# EAGLE board wifi_4layer (EAGLE 5.11)
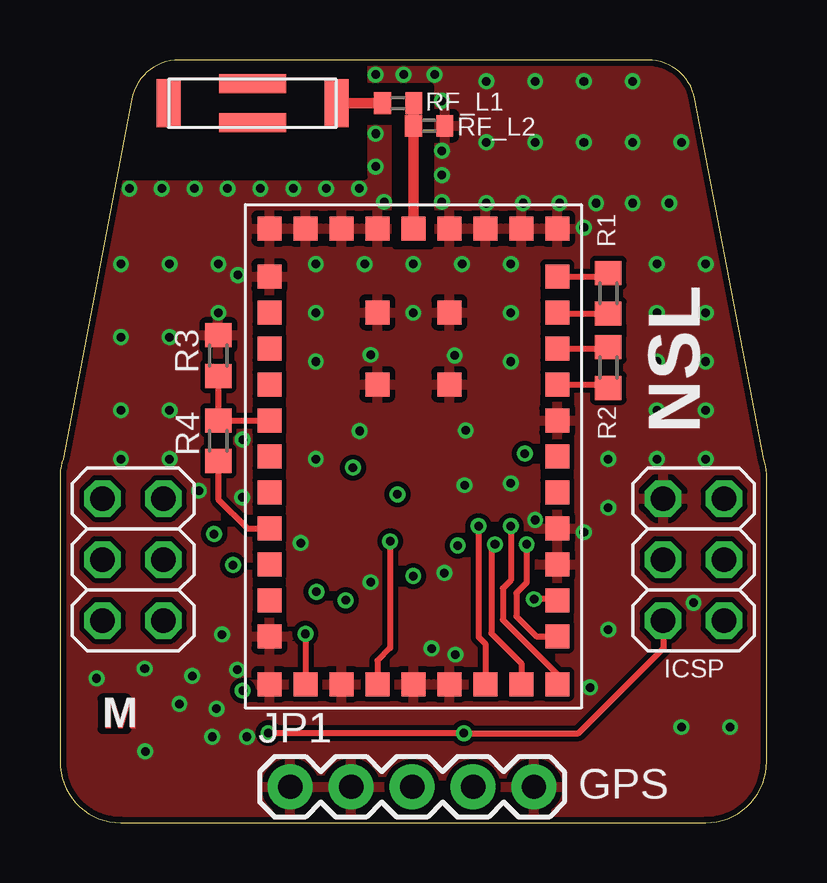
[diagram p0: board, top side]
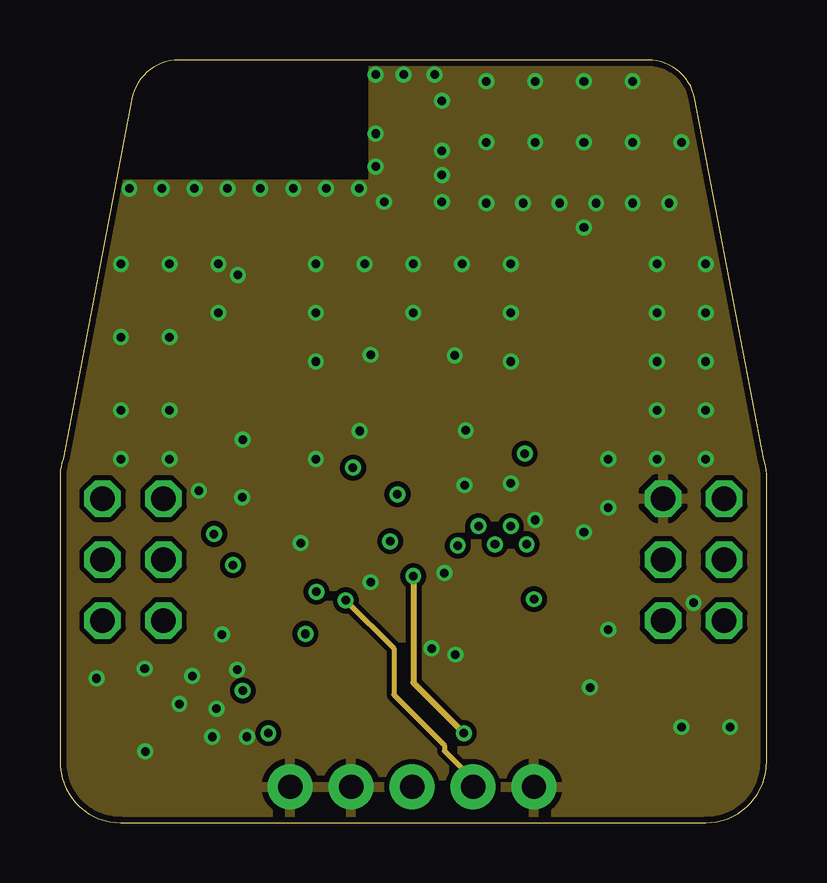
[diagram p1: board, inner layer Route2]
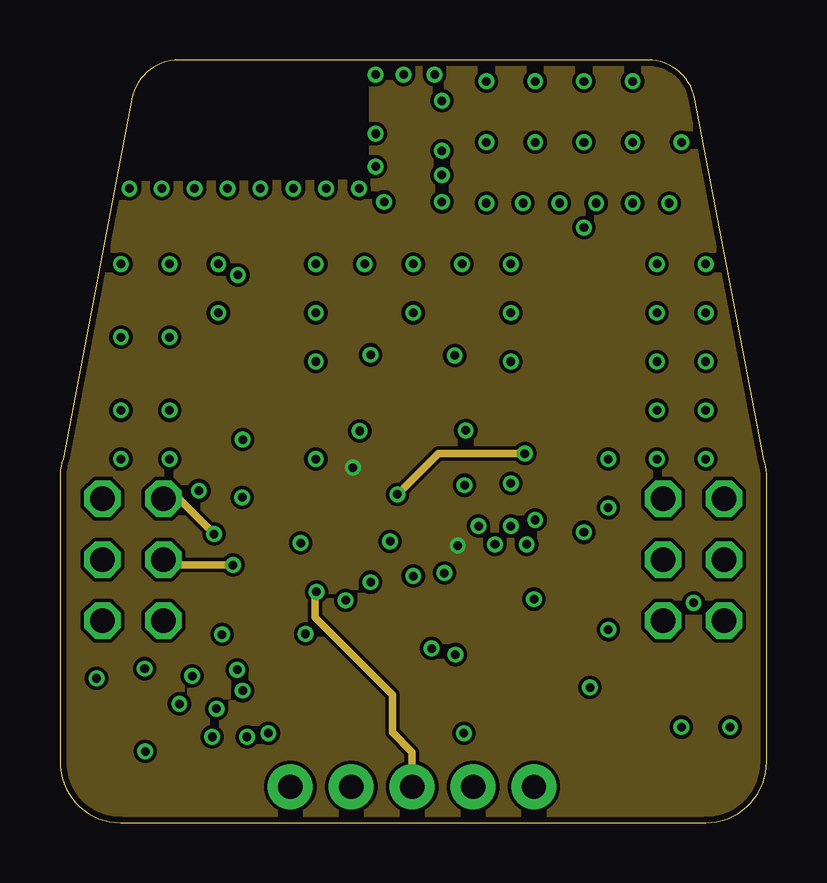
[diagram p2: board, inner layer Route15]
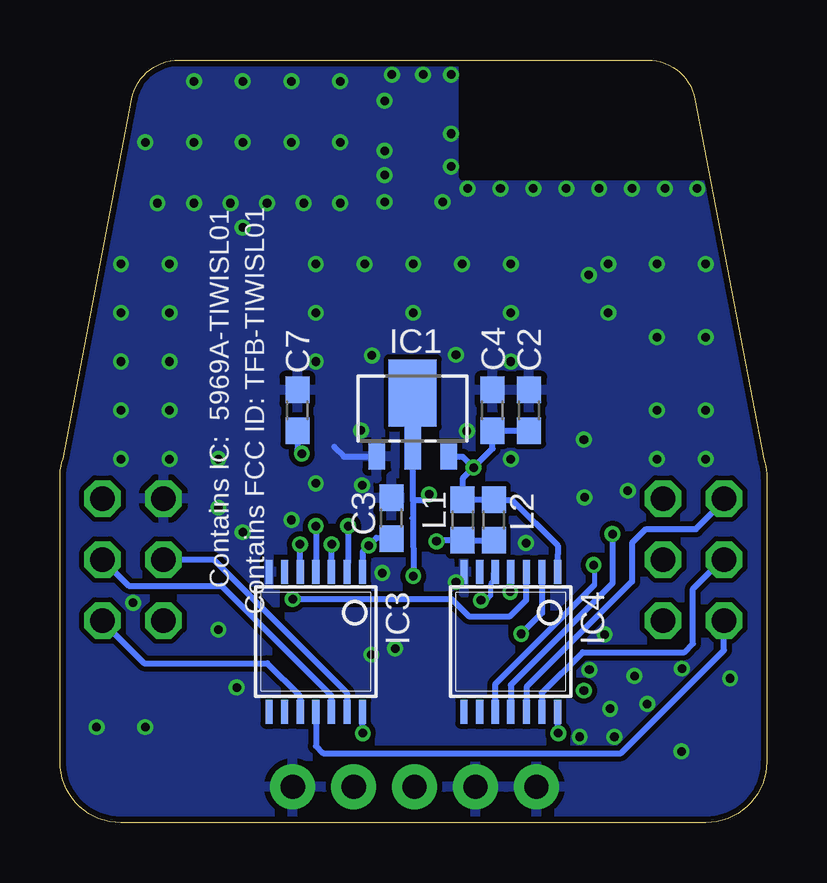
[diagram p3: board, bottom side, seen from below]

Size 29.46 x 31.8 mm. Coordinates in mm from the lower left corner, seen from the top.
Outline: 0.13,15.17 arc18 0,14.37 0,2.54 arc90 2.54,0 26.92,0 arc90 29.46,2.54 29.46,14.37 arc18 29.34,15.17 26.47,30.18 arc79 24.51,31.8 4.96,31.8 arc79 2.99,30.18 0.13,15.17
Copper layers (1*2+15*16): Top 0.035mm / dielectric 0.2032mm / Route2 0.035mm / dielectric 1.016mm / Route15 0.035mm / dielectric 0.2032mm / Bottom 0.035mm
Design rules "ITead_rule *": minimum track width 6mil, minimum drill 12mil, track to track 6mil, track to pad 6mil, pad to pad 6mil, via to via 6mil, smd to smd 0mil, copper to edge 10mil, drill to drill 10mil, minimum pad ring 10mil, minimum via ring 6mil, stop-mask expansion 2mil, vias tented up to drill 14mil, thermal gap 10mil
Net classes: 0 default: width 0.203 mm, drill 0.356 mm, clearance 0.203 mm; 1 power: width 0.203 mm
tRestrict: area 2.1,26.9 to 12.7,32.8; area 12.8,24 to 15.5,30.7
bRestrict: area 2.6,26.9 to 12.7,32.9

## Footprints (pad centres in the part's own frame; a part is rotated, then mirrored left to right if it is on the bottom)
C0603 = smd 1.1 x 1: 1 -0.85,0; 2 0.85,0
SOT89-3L = smd 0.7 x 1.1: 1 -1.5,-1.75; 3 1.5,-1.75 | smd 0.7 x 1.8: 2 0,-1.4 | smd 2 x 2.8: 4 0,0.9
TIWI-SL = smd 1 x 1: P$1 -6,7.5; P$2 -6,6; P$3 -6,4.5; P$4 -6,3; P$5 -6,1.5; P$6 -6,0; P$7 -6,-1.5; P$8 -6,-3; P$9 -6,-4.5; P$10 -6,-6; P$11 -6,-7.5; P$12 -6,-9.5; P$13 -4.5,-9.5; P$14 -3,-9.5; P$15 -1.5,-9.5; P$16 0,-9.5; P$17 1.5,-9.5; P$18 3,-9.5; P$19 4.5,-9.5; P$20 6,-9.5; P$21 6,-7.5; P$22 6,-6; P$23 6,-4.5; P$24 6,-3; P$25 6,-1.5; P$26 6,0; P$27 6,1.5; P$28 6,3; P$29 6,4.5; P$30 6,6; P$31 6,7.5; P$32 6,9.5; P$33 4.5,9.5; P$34 3,9.5; P$35 1.5,9.5; P$36 0,9.5; P$37 -1.5,9.5; P$38 -3,9.5; P$39 -4.5,9.5; P$40 -6,9.5; P$41 -1.5,6; P$42 1.5,6; P$43 -1.5,3; P$44 1.5,3
TSSOP-14 = smd 0.305 x 0.991: 1 -1.95,-2.918; 2 -1.3,-2.918; 3 -0.65,-2.918; 4 0,-2.918; 5 0.65,-2.918; 6 1.3,-2.918; 7 1.95,-2.918; 8 1.95,2.918; 9 1.3,2.918; 10 0.65,2.918; 11 0,2.918; 12 -0.65,2.918; 13 -1.3,2.918; 14 -1.95,2.918
2X03 = drill 1.016 octagon: 1 -2.54,-1.27; 2 -2.54,1.27; 3 0,-1.27; 4 0,1.27; 5 2.54,-1.27; 6 2.54,1.27
1X05 = drill 1.016 pad 1.88 round: 1 0,0; 2 2.54,0; 3 5.08,0; 4 7.62,0; 5 10.16,0
0603 = smd 1.1 x 1: 1 -0.85,0; 2 0.85,0
R0603 = smd 1 x 1.1: 1 -0.85,0; 2 0.85,0
C0402 = smd 0.7 x 0.9: 1 -0.65,0; 2 0.65,0
CHIP_ANT = smd 1 x 2: 1 3.5,0; 4 -3.5,0 | smd 2.8 x 0.8: 2 0,0.815; 3 0,-0.815

## Placement (x,y rotation side)
C2  0.1uF  [C0603]  9.91,17.2 90 bottom
C3  0.1uF  [C0603]  15.65,12.7 90 bottom
C4  .3pf  [C0603]  11.43,17.2 90 bottom
C7  0.1uF  [C0603]  19.56,17.2 90 bottom
IC1  AP1115B  [SOT89-3L]  14.76,17.02 0 bottom
IC2  TIWI-SL  [TIWI-SL]  14.73,15.28 0 top
IC3  TXS0104EPWR  [TSSOP-14]  18.8,7.54 180 bottom
IC4  TXS0104EPWR  [TSSOP-14]  10.67,7.54 180 bottom
ICSP  ICSP  [2X03]  26.42,10.97 90 top
JP1  GPS  [1X05]  9.6,1.5 0 top
L1  1nH CI160808-1N0D  [0603]  12.67,12.62 270 bottom
L2  1nH CI160808-1N0D  [0603]  11.38,12.62 270 bottom
R1  0R  [R0603]  22.86,22.07 90 top
R2  0R  [R0603]  22.86,18.97 90 top
R3  0R - TEST DNP  [R0603]  6.6,19.48 90 top
R4  0R  [R0603]  6.6,15.93 90 top
RF_L1  [C0402]  15.39,29.06 0 top
RF_L2  [C0402]  14.1,30 180 top
TX/RX  TX/RX  [2X03]  3.05,10.97 90 top
U$3  ANT  [CHIP_ANT]  8.03,30 0 top

## Library data of the parts
C2-C4 C7 = rcl
IC1 = wifi
IC2-IC4 R1-R4 = pcbqr_v3
ICSP TX/RX = pinhead
JP1 L1 L2 RF_L1 RF_L2 = SparkFun
U$3 = wifi_4layer

## Nets
3V3 [power]: C2.1 C3.1 C4.1 IC1.3 IC3.1 IC4.1 L1.1 L2.1
5V [power]: C7.1 IC1.2 IC1.4 IC3.14 IC4.14 ICSP.2
CS: IC3.11 TX/RX.2
GND: C2.2 C3.2 C4.2 C7.2 IC1.1 IC2.P$1 IC2.P$11 IC2.P$12 IC2.P$14 IC2.P$16 IC2.P$17 IC2.P$23 IC2.P$24 IC2.P$27 IC2.P$32 IC2.P$33 IC2.P$34 IC2.P$35 IC2.P$37 IC2.P$38 IC2.P$39 IC2.P$40 IC2.P$41 IC2.P$42 IC2.P$43 IC2.P$44 IC3.7 IC4.7 ICSP.6 JP1.1 JP1.2 JP1.5 R3.2 RF_L1.2
MISO: IC3.10 ICSP.1
MOSI: IC3.13 ICSP.4
N$1: TX/RX.1
N$3: IC2.P$36 RF_L1.1 RF_L2.1
N$5: RF_L2.2 U$3.1
N$96: IC2.P$5 R3.1 R4.2
N$97: IC2.P$8 R4.1
N$98: IC2.P$31 R1.2
N$99: IC2.P$30 R1.1
N$100: IC2.P$29 R2.2
N$101: IC2.P$28 R2.1
N$102: IC2.P$15 L1.2 L2.2
N$117: IC3.8
N$126: IC4.8
PWR_EN: IC2.P$13 IC4.2
RST: ICSP.5
RX_3V3: IC4.5 JP1.4
RX_5V: IC4.10 TX/RX.3
SCK: IC3.12 ICSP.3
SPI_CLK: IC2.P$19 IC3.3
SPI_CS: IC2.P$20 IC3.4
SPI_DI: IC2.P$18 IC3.2
SPI_DO: IC2.P$21 IC3.5
SPI_IRQ: IC2.P$22 IC4.3
TX_3V3: IC4.4 JP1.3
TX_5V: IC4.11 TX/RX.5
WIFI_EN: IC4.13 TX/RX.4
WIFI_IRQ: IC4.12 TX/RX.6

## Tracks (layer width: path | path; a pad name or v marks a point on that pad's centre or on a via)
3V3  (via drill 0.36)
  Route15 0.254: v16.59,11.56 16.59,11.58 16.54,11.63 | v12.22,14.81 12.22,14.91
  Bottom 0.254: IC3.1 16.85,11.3 v16.59,11.56 16.27,11.88 C3.1 | IC4.1 8.72,11.17 8.71,11.18 8.71,11.56 10.62,13.46 11.37,13.46 L2.1 L1.1 12.67,14.35 v12.22,14.81 | IC1.3 12.68,15.27 v12.22,14.81 | v12.22,14.81 11.43,15.6 C4.1 C2.1
  pour Route15: -2.79,26.49 -2.74,-1.63 30.56,-1.5 30.76,34.37 13.06,34.24 13.08,26.62
5V  (via drill 0.36)
  Top 0.254: ICSP.2 25.17,8.41 25.17,7.29 21.61,3.73 v16.84,3.73 v8.69,3.73
  Route2 0.254: v14.73,10.29 14.73,5.84 v16.84,3.73
  Route15 0.305: v19.38,15.39 15.77,15.39 v14.07,13.69
  Bottom 0.203: 14.74,12.65 14.79,12.7
  Bottom 0.254: IC3.14 v16.84,3.73 | IC4.14 8.74,4.61 v8.69,3.73 | v14.73,10.29 14.74,12.65 14.74,12.78 14.75,13.43 | 14.75,13.43 14.75,13.9 IC1.2 IC1.4 | C7.1 19.56,15.57 v19.38,15.39 | v14.07,13.69 14.33,13.43 14.75,13.43
CS
  Bottom 0.254: IC3.11 18.8,3.2 18.49,2.9 6.07,2.9 1.78,7.19 TX/RX.2
GND  (via drill 0.36)
  Bottom 0.254: IC1.1 17.63,15.27 18.03,15.67
  other vias: 12.95,10.03 16.87,14.07 13.16,31.19 6.98,26.44 13.16,28.73 13.16,27.36 12.47,26.44 11.1,26.44 4.24,26.44 9.73,26.44 5.61,26.44 8.36,26.44 13.51,25.88 2.9,26.44 14.33,31.19 15.93,30.1 15.62,31.19 15.93,28.02 15.93,27 15.93,25.88 17.78,30.91 19.81,30.91 21.84,30.91 23.88,30.91 17.78,28.37 19.81,28.37 21.84,28.37 23.88,28.37 25.91,28.37 17.78,25.83 19.3,25.83 20.83,25.83 22.35,25.83 23.88,25.83 25.4,25.83 21.84,24.82 7.42,22.83 19.81,12.62 21.84,12.12 10.67,23.29 12.7,23.29 14.73,23.29 16.76,23.29 18.8,23.29 10.67,21.26 14.73,21.26 18.8,21.26 10.67,19.23 18.8,19.23 6.6,23.29 4.57,23.29 2.54,23.29 2.54,20.24 4.57,20.24 6.6,21.26 2.54,17.2 4.57,17.2 2.54,15.16 4.57,15.16 10.67,15.16 18.8,14.15 24.89,23.29 26.92,23.29 24.89,21.26 26.92,21.26 24.89,19.23 26.92,19.23 26.92,17.2 24.89,17.2 24.89,15.16 22.86,15.16 26.92,15.16 22.86,13.13 22.86,8.05 27.94,3.99 25.91,3.99 3.56,2.97 1.52,6.02 16.48,7.01 22.1,5.64 26.42,9.17 5.79,13.84 12.5,16.33 16.92,16.36 16.46,19.48 12.95,19.51 7.59,13.56 7.62,15.98 10.03,11.66 16.03,10.41 6.76,7.85 3.53,6.43 7.39,6.38 7.8,3.58 4.98,4.95 5.51,6.12 6.35,3.58 6.53,4.75 15.49,7.26
  pour Top: -0.64,-1.52 30.35,-1.52 30.63,33.78 -0.36,33.78
  pour Route2: -1.93,-1.4 30.28,-1.32 30.58,33.53 12.7,33.45 13.06,33.43 13.06,26.59 -1.73,26.62
  pour Bottom: -4.04,34.21 -4.06,-1.75 30.48,-1.88 30.51,34.09
MISO
  Bottom 0.254: IC3.10 19.46,4.64 19.46,5.28 20.83,6.65 25.96,6.65 27.69,8.38 ICSP.1
MOSI
  Bottom 0.254: IC3.13 17.5,5.41 23.06,10.97 ICSP.4
N$3
  Top 0.432: IC2.P$36 RF_L1.1 RF_L2.1
N$4  (via drill 0.36)
  other vias: 7.62,5.51
N$5
  Top 0.432: U$3.1 RF_L2.2
N$96
  Top 0.254: IC2.P$5 R4.2 R3.1
N$97
  Top 0.254: R4.1 6.6,13.49 7.82,12.27 IC2.P$8
N$98
  Top 0.254: IC2.P$31 22.71,22.78 R1.2
N$99
  Top 0.254: R1.1 20.79,21.22 IC2.P$30
N$100
  Top 0.254: IC2.P$29 22.81,19.78 R2.2
N$101
  Top 0.254: IC2.P$28 22.71,18.28 R2.1
N$102  (via drill 0.36)
  Top 0.254: v13.77,11.73 13.77,7.29 13.23,6.76 IC2.P$15
  Bottom 0.254: L2.2 L1.2 13.73,11.77 v13.77,11.73
PWR_EN  (via drill 0.36)
  Top 0.254: v10.24,7.87 IC2.P$13
  Bottom 0.254: v10.24,7.87 9.37,8.74 IC4.2
RX_3V3  (via drill 0.36)
  Route2 0.203: JP1.4 17.22,1.8 16.03,3 16.03,3.23 13.92,5.33 13.92,7.26 v11.91,9.27
  Bottom 0.203: IC4.5 11.4,10.37 11.4,10.06 11.51,9.96 11.51,9.47 11.71,9.27 v11.91,9.27
RX_5V  (via drill 0.36)
  Route15 0.305: v7.21,10.74 4.55,10.74 TX/RX.3
  Bottom 0.203: 11.33,4.64 IC4.10 | 7.19,9.91 7.19,10.72 v7.21,10.74
  Bottom 0.254: 7.19,9.91 10.9,6.2 | 10.9,6.2 11.25,5.84 | 11.33,4.64 11.33,5.77 10.9,6.2
SCK
  Bottom 0.254: ICSP.3 26.59,9.88 22.73,9.88 18.16,5.31 18.16,5.13 18.15,5.12 IC3.12
SPI_CLK  (via drill 0.36)
  Top 0.254: v18.14,11.61 17.98,11.43 17.98,7.9 19.23,6.65 IC2.P$19
  Bottom 0.254: IC3.3 v18.14,11.61
SPI_CS  (via drill 0.36)
  Top 0.254: v18.8,12.37 18.8,10.11 18.47,9.78 18.47,8.46 20.73,6.19 IC2.P$20
  Bottom 0.254: v18.8,12.37 IC3.4
SPI_DI  (via drill 0.36)
  Top 0.254: IC2.P$18 17.73,7.46 17.45,7.75 v17.45,12.37
  Bottom 0.254: IC3.2 17.5,10.79 17.45,10.85 v17.45,12.37
SPI_DO  (via drill 0.36)
  Top 0.254: v19.46,11.61 19.46,10.01 19.02,9.58 19.02,8.61 19.86,7.77 IC2.P$21
  Bottom 0.254: IC3.5 19.45,11.67 v19.46,11.61
SPI_IRQ  (via drill 0.36)
  Top 0.254: v19.76,9.32 20.69,9.32 IC2.P$22
  Bottom 0.203: 10.25,9.05 10.03,9.27 | 10.03,10.45 IC4.3 10.02,10.12
  Bottom 0.254: v19.76,9.32 13.13,9.32 12.42,8.61 10.69,8.61 10.25,9.05 10.02,9.29 10.02,10.12
TX_3V3  (via drill 0.36)
  Route15 0.254: v10.69,9.63 10.64,9.58
  Route15 0.305: JP1.3 14.68,2.95 13.87,3.76 13.87,5.33 10.64,8.56 10.64,9.58
  Bottom 0.203: IC4.4 10.64,10.46
  Bottom 0.254: 10.64,10.46 v10.69,9.63
TX_5V  (via drill 0.36)
  Route15 0.305: v6.43,12.04 4.95,13.51 TX/RX.5
  Bottom 0.254: IC4.11 10.67,5.74 6.43,9.98 v6.43,12.04
WIFI_EN
  Bottom 0.254: IC4.13 9.37,5.41 7.67,7.11 3.43,7.11 3.07,7.47 3.07,9.75 1.85,10.97 TX/RX.4
WIFI_IRQ
  Bottom 0.254: IC4.12 10.01,4.64 10.01,5.66 5.61,10.06 5.61,11.66 5.03,12.24 2.95,12.24 1.78,13.41 TX/RX.6

## Text on the board
Top: M
tPlace: NSL | M | GPS
bPlace: Contains FCC ID: TFB-TIWISL01 | Contains IC: 5969A-TIWISL01